# Altium PCB Pmod_KYPD.PcbDoc
Units mm, origin at the board's own origin, x right, y up, seen from the top; angles counter-clockwise.
Board outline 50 x 60 mm, 2 copper layers (Top Layer, Bottom Layer); 25 components, 14 nets, 92 pads, 4 vias.
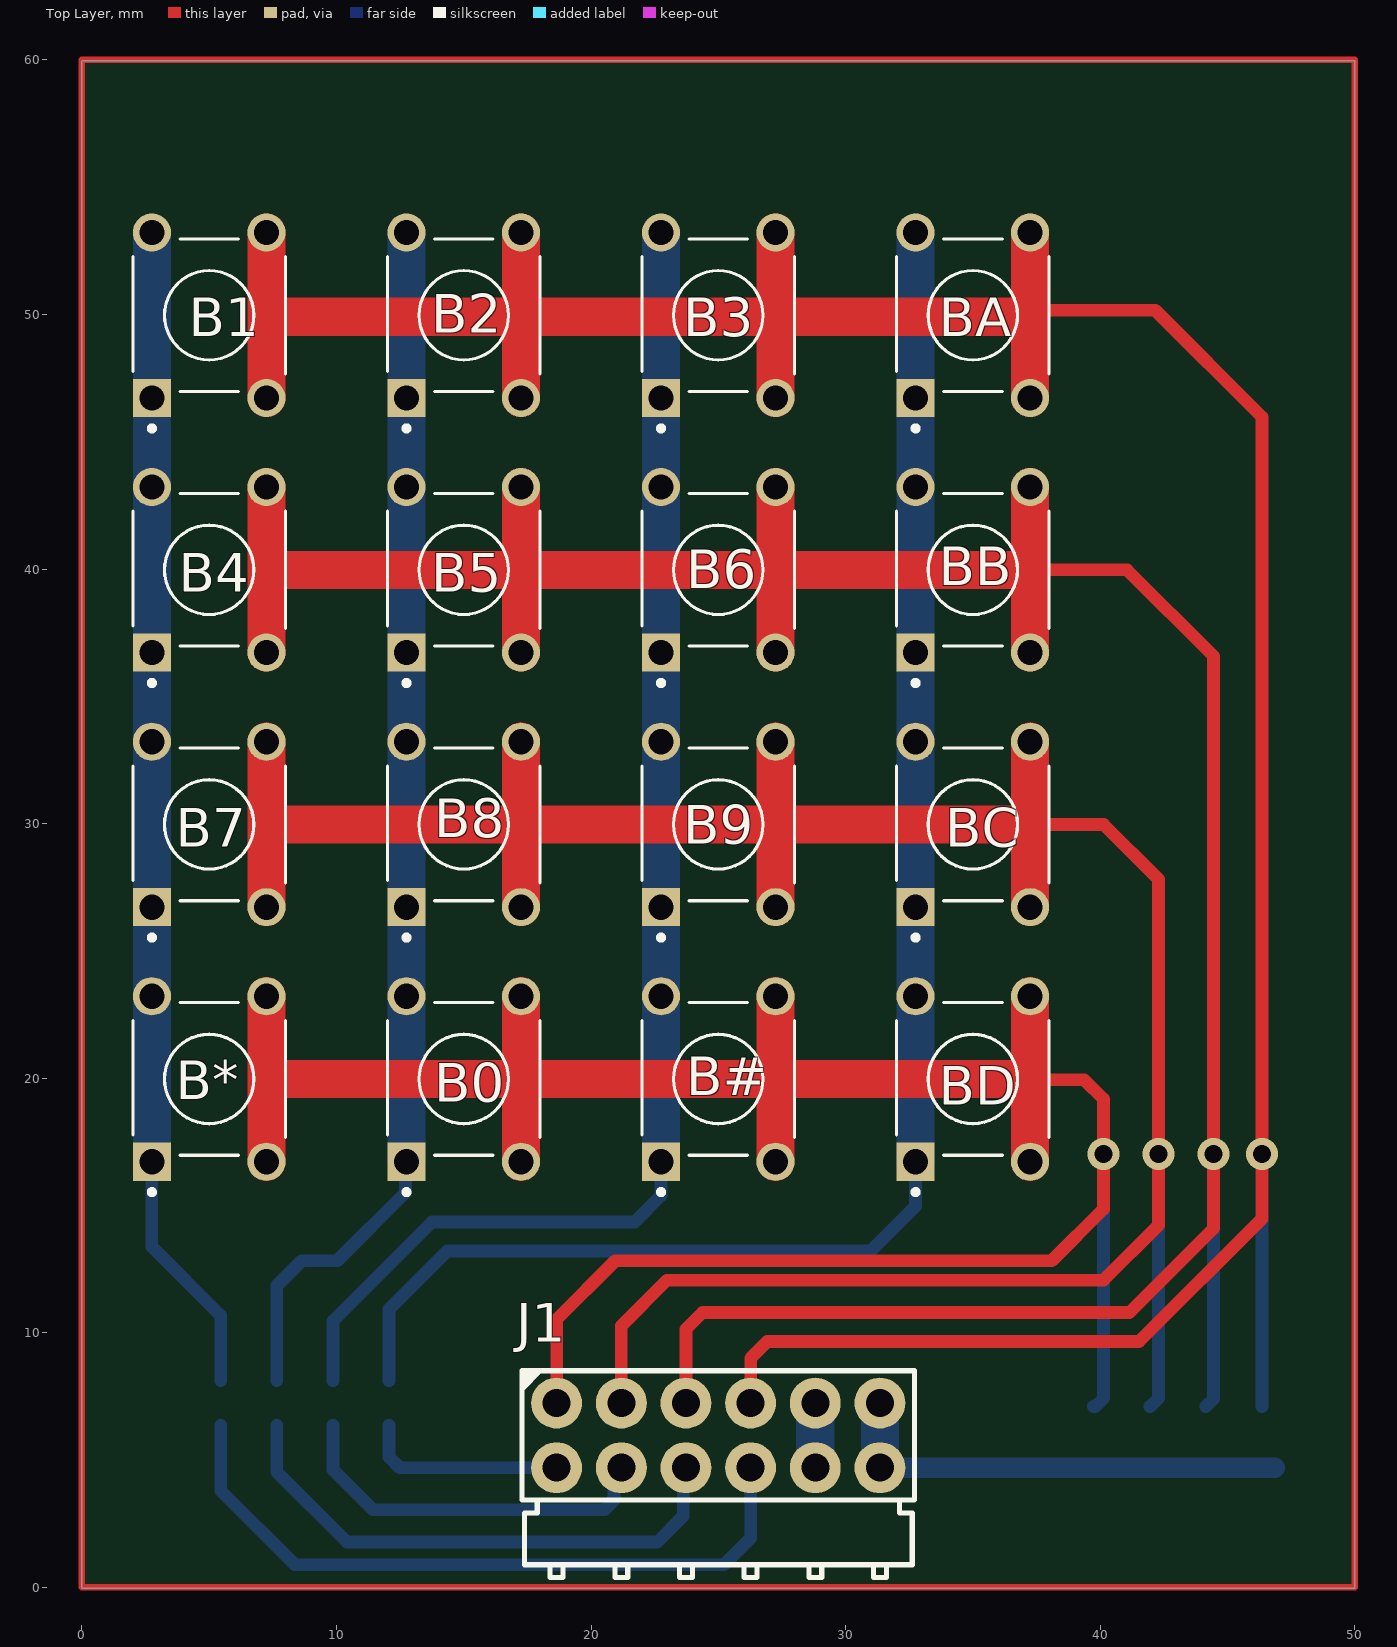
[diagram p0: Top Layer view]
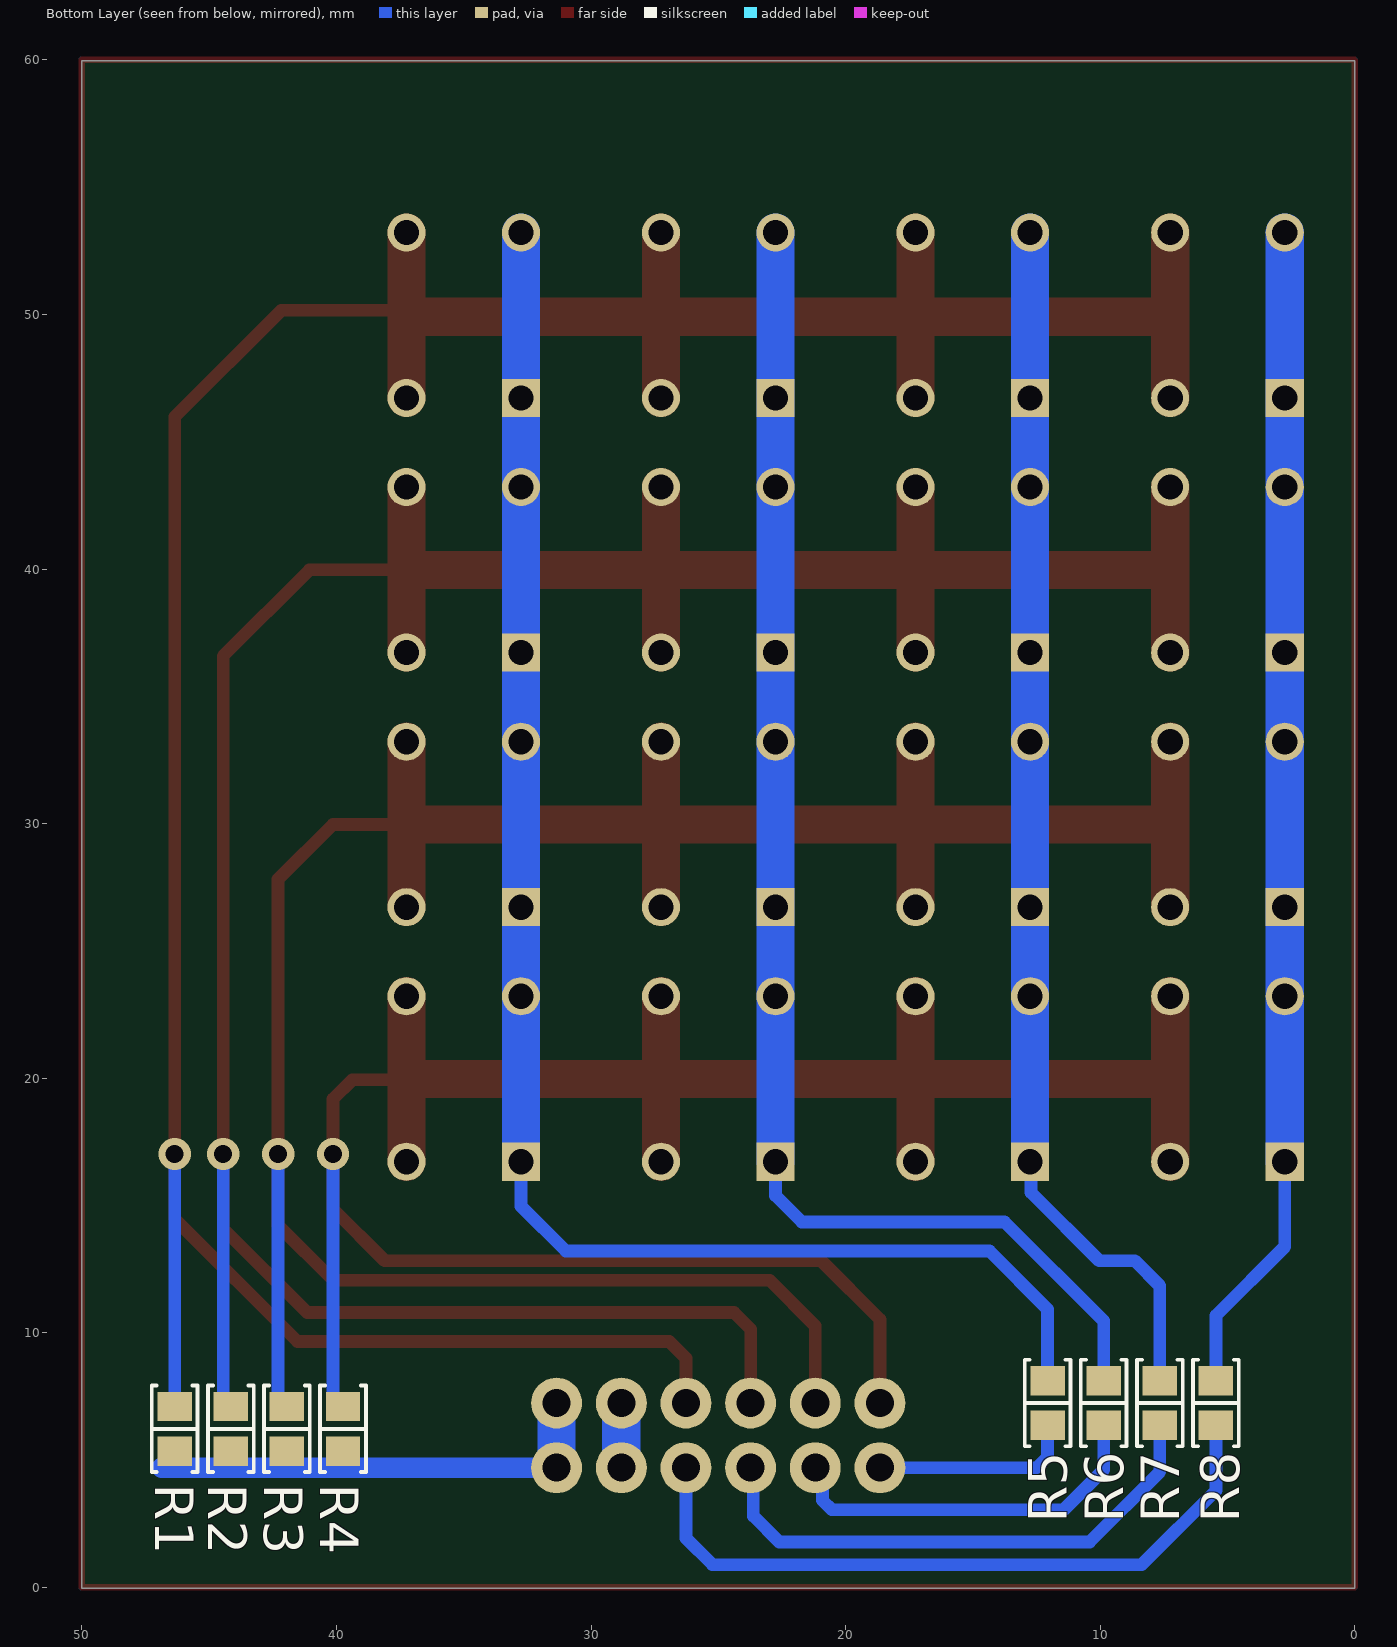
[diagram p1: Bottom Layer view, seen from below]
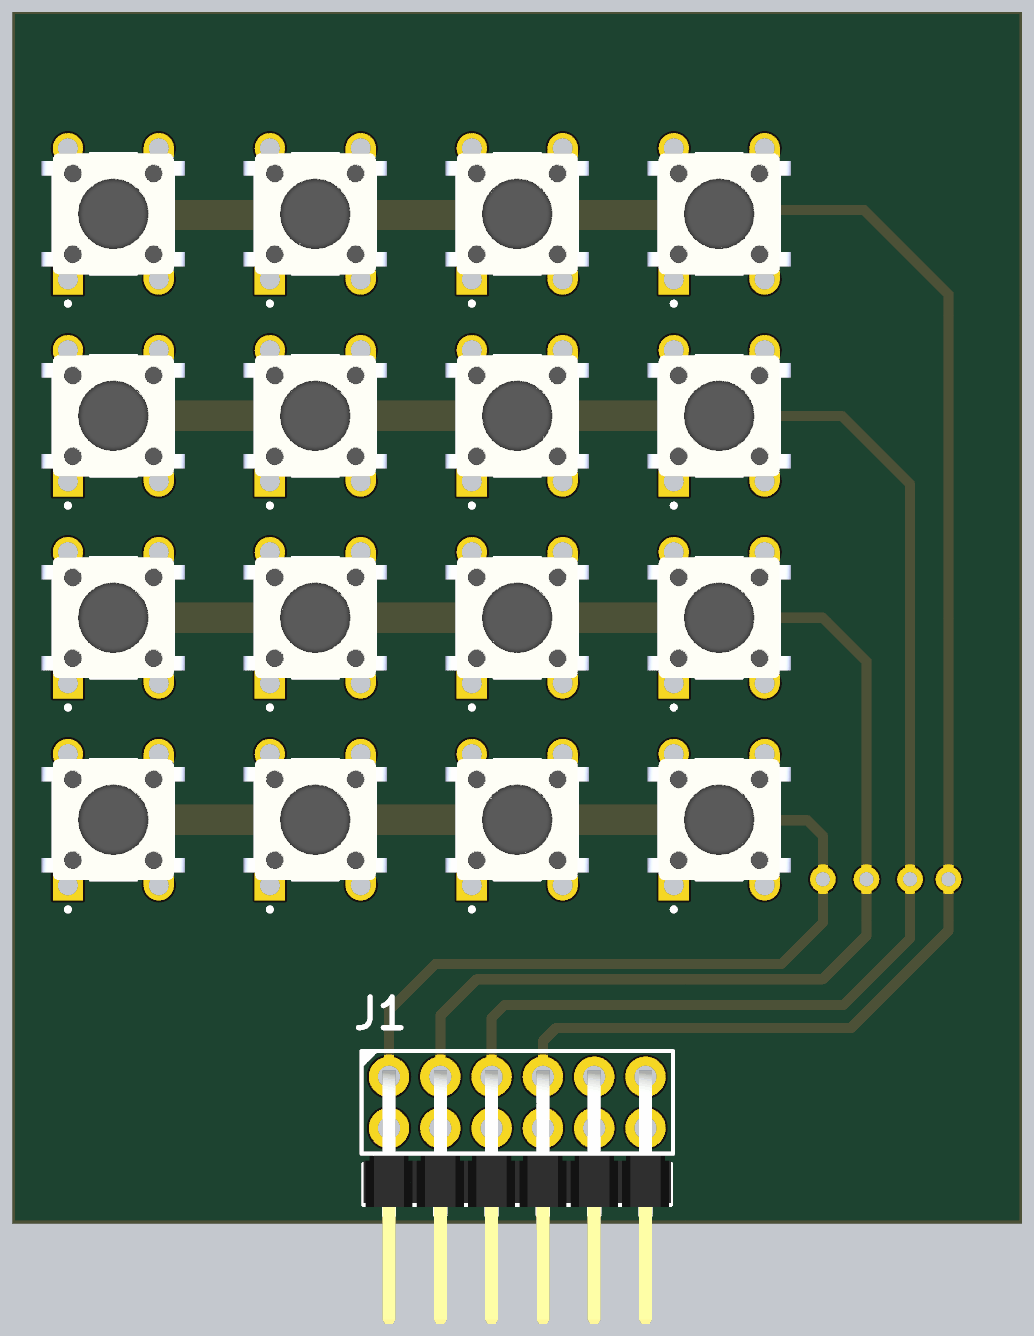
[diagram p2: 3D render of the assembled board from above, using the file's embedded part models]
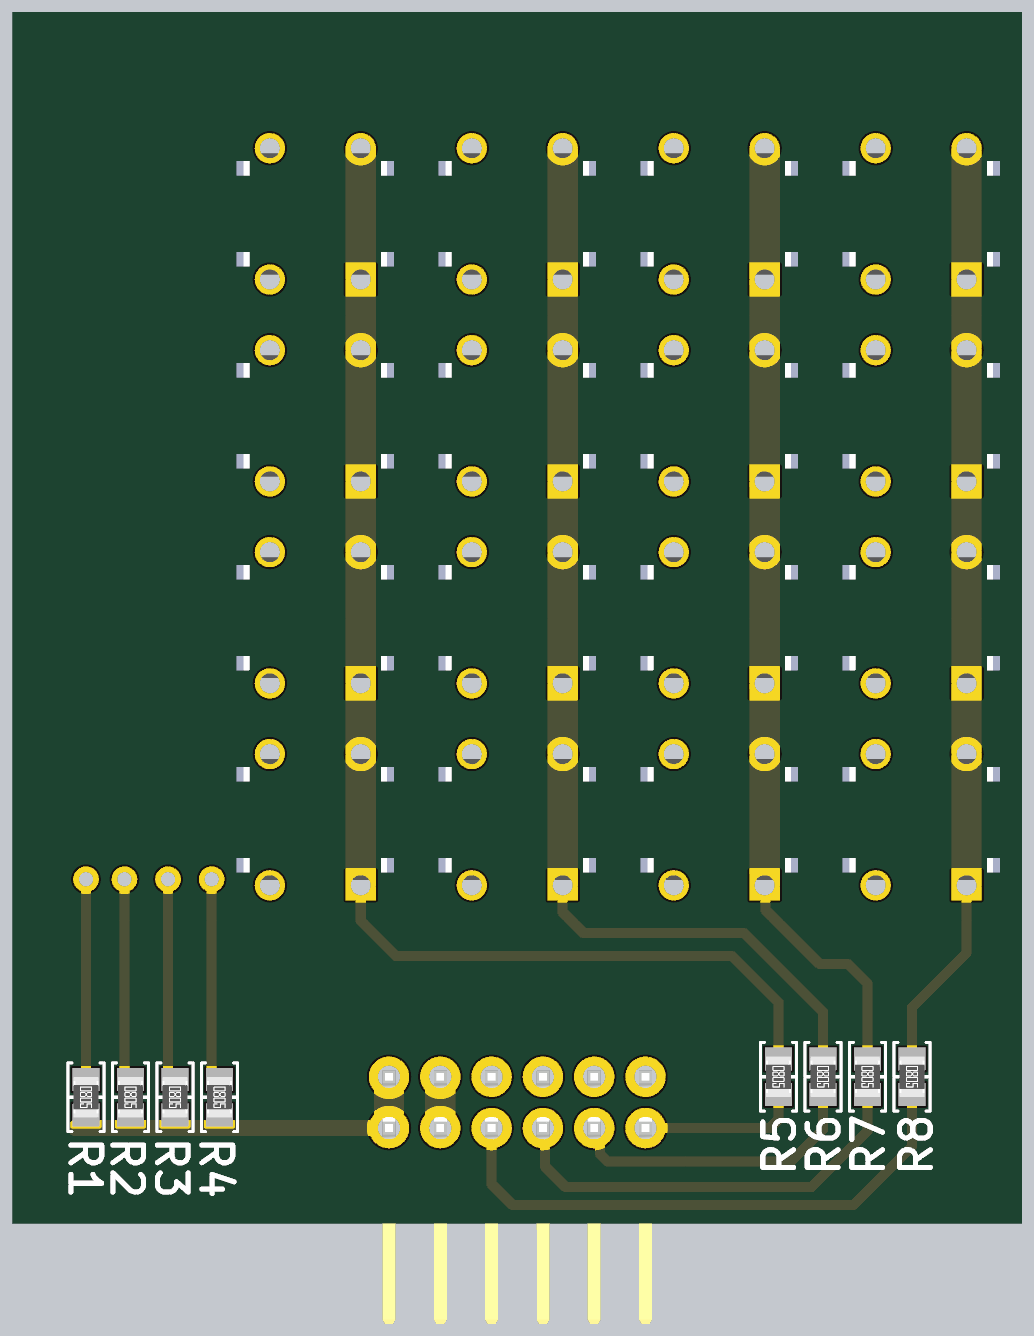
[diagram p3: 3D render of the assembled board from below, using the file's embedded part models]

## Layer stack, top to bottom
Top Solder: solder mask 0.0102, Solder Resist, Dk 3.5
Top Layer: signal copper 0.0356
Dielectric 1: dielectric 0.32, FR-4, Dk 4.8
Bottom Layer: signal copper 0.0356
Bottom Solder: solder mask 0.0102, Solder Resist, Dk 3.5

## Board outline
0,-0.033 0,59.967 50,59.967 50,-0.033

## Design rules (kind name [scope] priority, off if disabled: settings)
Clearance [All] p1: gap=0.254 ignorepadtopadclearanceinfootprint=FALSE except(0: Arc-Hole Track-Hole SMDPad-Hole THPad-Hole Via-Hole Fill-Hole Poly-Hole Region-Hole Text-Hole)
PolygonConnect [All] p1: connectstyle=Relief reliefconductorwidth=0.254 reliefentries=4 polygonreliefangle="90 Angle" airgapwidth=0.254
RoutingVias [All] p1: holewidth=0.711 width=1.27 viastyle="Through Hole" minholewidth=0.711 minwidth=1.27 maxholewidth=0.711 maxwidth=1.27
SolderMaskExpansion [All] p1: expansion=0.102 istentingtop=FALSE
Width [All] p1: maxlimit=1.5 minlimit=0.254 preferedwidth=0.8
30 further rules are at their usual default settings.

## Components (designator, comment, footprint, x,y, rotation, side; value= is the part's Value field where it differs from the comment)
B0 "1825910-6" SW_1825910-6-4 15,19.967 r90 top
B1 "1825910-6" SW_1825910-6-4 5,49.967 r90 top
B2 "1825910-6" SW_1825910-6-4 15,49.967 r90 top
B3 "1825910-6" SW_1825910-6-4 25,49.967 r90 top
B4 "1825910-6" SW_1825910-6-4 5,39.967 r90 top
B5 "1825910-6" SW_1825910-6-4 15,39.967 r90 top
B6 "1825910-6" SW_1825910-6-4 25,39.967 r90 top
B7 "1825910-6" SW_1825910-6-4 5,29.967 r90 top
B8 "1825910-6" SW_1825910-6-4 15,29.967 r90 top
B9 "1825910-6" SW_1825910-6-4 25,29.967 r90 top
B# "1825910-6" SW_1825910-6-4 25,19.967 r90 top
B* "1825910-6" SW_1825910-6-4 5,19.967 r90 top
BA "1825910-6" SW_1825910-6-4 35,49.967 r90 top
BB "1825910-6" SW_1825910-6-4 35,39.967 r90 top
BC "1825910-6" SW_1825910-6-4 35,29.967 r90 top
BD "1825910-6" SW_1825910-6-4 35,19.967 r90 top
J1 "M20-9740646" "HARWIN M20-9740645" 25,5.967 r0 top
R1 "10 kOhms" "RES 0805_2012" 46.355,6.223 r270 bottom
R2 "10 kOhms" "RES 0805_2012" 44.151,6.223 r270 bottom
R3 "10 kOhms" "RES 0805_2012" 41.946,6.223 r270 bottom
R4 "10 kOhms" "RES 0805_2012" 39.742,6.223 r270 bottom
R5 "470 Ohms" "RES 0805_2012" 12.065,7.239 r270 bottom
R6 "470 Ohms" "RES 0805_2012" 9.861,7.239 r270 bottom
R7 "470 Ohms" "RES 0805_2012" 7.656,7.239 r270 bottom
R8 "470 Ohms" "RES 0805_2012" 5.452,7.239 r270 bottom

## Footprints (in the part's own frame and the unit in brackets; to place one, negate y for a bottom-side part, rotate by r counter-clockwise, add the part's x,y. Pads: shape width x height; smd on the part's side, far side on the other; paste and mask are expansions set on the pad)
"HARWIN M20-9740645" [mm] "2.54mm DIL PC TAIL PIN HEADER ASSEMBLY"
  round 2 hole 1.1: 1(-6.35,1.27) 2(-3.81,1.27) 3(-1.27,1.27) 4(1.27,1.27) 5(3.81,1.27) 6(6.35,1.27) 7(6.35,-1.27) 8(3.81,-1.27) 9(1.27,-1.27) 10(-1.27,-1.27) 11(-3.81,-1.27) 12(-6.35,-1.27)
  silkscreen extent -7.73,-5.59 7.71,2.57, body extent -7.62,-10.97 7.62,1.59, height 5
"RES 0805_2012" [mm] "Chip Resistor, 2-Leads, Body 2.00x1.25mm, IPC Medium Density"
  rect 1.15x1.35 smd: 1(-0.875,0) 2(0.875,0)
  silkscreen extent -1.7,-0.9 1.7,0.9, body extent -1,-0.62 1,0.63, height 0.6
SW_1825910-6-4 [mm]
  rect 1.498x1.498 / inner round 1.498 / far side rect 1.498x1.498 hole 0.99: 1(-3.25,2.25)
  round 1.498 hole 0.99: 2(3.25,2.25) 3(-3.25,-2.25) 4(3.25,-2.25)
  silkscreen extent -4.54,-3 3,3, body extent -3,-3.9 3,3.9, height 5.01

## Part data
B0 B1 B2 B3 B4 B5 B6 B7 B8 B9 B# B* BA BB BC BD: "Switch Push Button OFF (ON) SPST Round Button 0.05A 24VDC Momentary Contact PC Pins Thru-Hole", Package=None, Check_prices=https://www.snapeda.com/parts/1825910-6/TE+Connectivity+ALCOSWITCH+Switches/view-part/?ref=eda, Digi-Key_Part_Number=450-1650-ND, MF="TE Connectivity", MP=1825910-6, Purchase-URL=https://pricing.snapeda.com/search/part/1825910-6/?ref=eda, SnapEDA_Link=https://www.snapeda.com/parts/1825910-6/TE+Connectivity+ALCOSWITCH+Switches/view-part/?ref=snap
J1: "CONN HEADER R/A 12POS 2.54MM", Part Number=M20-9740646
R1 R2 R3 R4: library part TNPU080510K0AWEN00, "TNPU0805 10K 0.05% 2PPM E52 E3", Part Number=TNPU080510K0AWEN00
R5 R6 R7 R8: library part RC0805JR-07470RP, "RES SMD 470 OHM 5% 1/8W 0805", Part Number=RC0805JR-07470RP

## Via types
v1: diameter 1.27, hole 0.711, Top Layer to Bottom Layer, 4 vias

## Nets (pads, with @x,y where several pads share a name; then routed paths per layer and width w, separated by ;. In a path a pad name is that pad's centre, name@x,y a point inside that pad or via, vN(x,y) a via of type N, cw(c..) or ccw(c..) an arc to the next point about the centre after c; other vN are vias at no path point)
GND: J1.5 J1.8 | length 2.5
  Bottom Layer w1.5: J1.8 J1.5
NetB0_1: B0.1 B0.2 B2.1 B2.2 B5.1 B5.2 B8.1 B8.2 R7.1 | length 48
  Bottom Layer w0.5: R7.1 7.656,11.847 8.636,12.827 10.033,12.827 12.717,15.511 12.717,16.684 B0.1
  Bottom Layer w1.5: B0.1 B0.2 B8.1 B8.2 B5.1 B5.2 B2.1 B2.2
NetB0_3: B0.3 B0.4 B#.3 B#.4 B*.3 B*.4 BD.3 BD.4 J1.1 R4.1 | length 100.2
  Top Layer w0.5: J1.1 18.65,10.522 20.955,12.827 38.1,12.827 40.132,14.859 v1(40.132,17.018) 40.132,19.177 39.37,19.939 37.278,19.939 37.25,19.967
  Top Layer w1.5: B*.3 7.25,19.967 ; B*.4 7.25,19.967 ; B0.3 17.25,19.967 ; B0.4 17.25,19.967 ; B#.3 27.25,19.967 ; B#.4 27.25,19.967 ; BD.3 37.25,19.967 ; BD.4 37.25,19.967 ; 7.25,19.967 17.25,19.967 ; 17.25,19.967 27.25,19.967 ; 27.25,19.967 37.25,19.967
  Bottom Layer w0.5: R4.1 39.807,7.098 40.132,7.423 v1(40.132,17.018)
NetB1_1: B1.1 B1.2 B4.1 B4.2 B7.1 B7.2 B*.1 B*.2 R8.1 | length 46.2
  Bottom Layer w0.5: B*.1 2.75,13.379 5.452,10.677 R8.1
  Bottom Layer w1.5: B*.1 B*.2 B7.1 B7.2 B4.1 B4.2 B1.1 B1.2
NetB1_3: B1.3 B1.4 B2.3 B2.4 B3.3 B3.4 BA.3 BA.4 J1.4 R1.1 | length 132.2
  Top Layer w0.5: J1.4 26.27,8.998 26.924,9.652 41.529,9.652 46.355,14.478 v1(46.355,17.018) 46.355,45.974 42.164,50.165 37.504,50.165 37.25,49.911
  Top Layer w1.5: B1.3 7.25,49.911 ; B1.4 7.25,49.911 ; B2.3 17.25,49.911 ; B2.4 17.25,49.911 ; B3.3 27.25,49.911 ; B3.4 27.25,49.911 ; 37.123,49.911 27.25,49.911 ; BA.3 37.25,49.784 ; 37.25,49.911 BA.4 ; 7.25,49.911 17.25,49.911 ; 17.25,49.911 27.25,49.911
  Bottom Layer w0.5: R1.1 v1(46.355,17.018)
NetB3_1: B3.1 B3.2 B6.1 B6.2 B9.1 B9.2 B#.1 B#.2 R6.1 | length 55.1
  Bottom Layer w0.5: R6.1 9.861,10.457 13.755,14.351 21.717,14.351 22.75,15.384 B#.1
  Bottom Layer w1.5: B#.1 B#.2 B9.1 B9.2 B6.1 B6.2 B3.1 B3.2
NetB4_3: B4.3 B4.4 B5.3 B5.4 B6.3 B6.4 BB.3 BB.4 J1.3 R2.1 | length 122.6
  Top Layer w0.5: J1.3 23.73,10.141 24.384,10.795 41.148,10.795 44.45,14.097 v1(44.45,17.018) 44.45,36.576 41.059,39.967 36.958,39.967 37.25,39.675
  Top Layer w1.5: B4.3 7.25,39.967 ; B4.4 7.25,39.967 ; B5.3 17.25,39.967 ; B5.4 17.25,39.967 ; B6.3 27.25,39.967 ; B6.4 27.25,39.967 ; BB.3 37.25,39.675 ; BB.4 37.25,40.259 36.958,39.967 27.25,39.967 ; 7.25,39.967 17.25,39.967 ; 17.25,39.967 27.25,39.967
  Bottom Layer w0.5: R2.1 44.45,7.397 v1(44.45,17.018)
NetB7_3: B7.3 B7.4 B8.3 B8.4 B9.3 B9.4 BC.3 BC.4 J1.2 R3.1 | length 111.4
  Top Layer w0.5: J1.2 21.19,10.268 22.987,12.065 40.132,12.065 42.291,14.224 v1(42.291,17.018) 42.291,27.813 40.137,29.967 37.245,29.967 37.25,29.962
  Top Layer w1.5: B7.3 7.25,29.967 ; B7.4 7.25,29.967 ; B8.3 17.25,29.967 ; B8.4 17.25,29.967 ; B9.3 27.25,29.967 ; B9.4 27.25,29.967 ; BC.3 37.25,29.962 ; BC.4 37.25,29.972 37.245,29.967 27.25,29.967 ; 7.25,29.967 17.25,29.967 ; 17.25,29.967 27.25,29.967
  Bottom Layer w0.5: R3.1 41.966,7.098 42.291,7.423 v1(42.291,17.018)
NetBA_1: BA.1 BA.2 BB.1 BB.2 BC.1 BC.2 BD.1 BD.2 R5.1 | length 63.4
  Bottom Layer w0.5: R5.1 12.065,10.922 14.351,13.208 30.988,13.208 32.75,14.97 BD.1
  Bottom Layer w1.5: BD.1 BD.2 BC.1 BC.2 BB.1 BB.2 BA.1 BA.2
NetJ1_9: J1.9 R8.2 | length 27.8
  Bottom Layer w0.5: R8.2 5.452,3.801 8.364,0.889 25.234,0.889 26.27,1.925 J1.9
NetJ1_10: J1.10 R7.2 | length 21.3
  Bottom Layer w0.5: R7.2 7.656,4.536 10.414,1.778 22.606,1.778 23.622,2.794 23.622,4.589 J1.10
NetJ1_11: J1.11 R6.2 | length 15
  Bottom Layer w0.5: R6.2 9.861,4.617 11.43,3.048 20.535,3.048 20.903,3.416 20.903,4.41 J1.11
NetJ1_12: J1.12 R5.2 | length 8
  Bottom Layer w0.5: R5.2 12.065,5.119 12.487,4.697 J1.12
VCC: J1.6 J1.7 R1.2 R2.2 R3.2 R4.2 | length 18.1
  Bottom Layer w0.8: J1.7 46.861,4.697 46.863,4.699
  Bottom Layer w1.5: J1.7 J1.6
copper on no net: | length 220
  Top Layer w0.254: 0,0 50,0 50,60 0,60 0,0